# Altium PCB PCB1.PcbDoc (part 2 of 3)
Units mil, origin at the board's own origin, x right, y up, seen from the top; angles counter-clockwise.
Board outline 1929.13 x 1929.13 mil, 2 copper layers (Top Layer, Bottom Layer); 46 components, 43 nets, 184 pads, 94 vias.
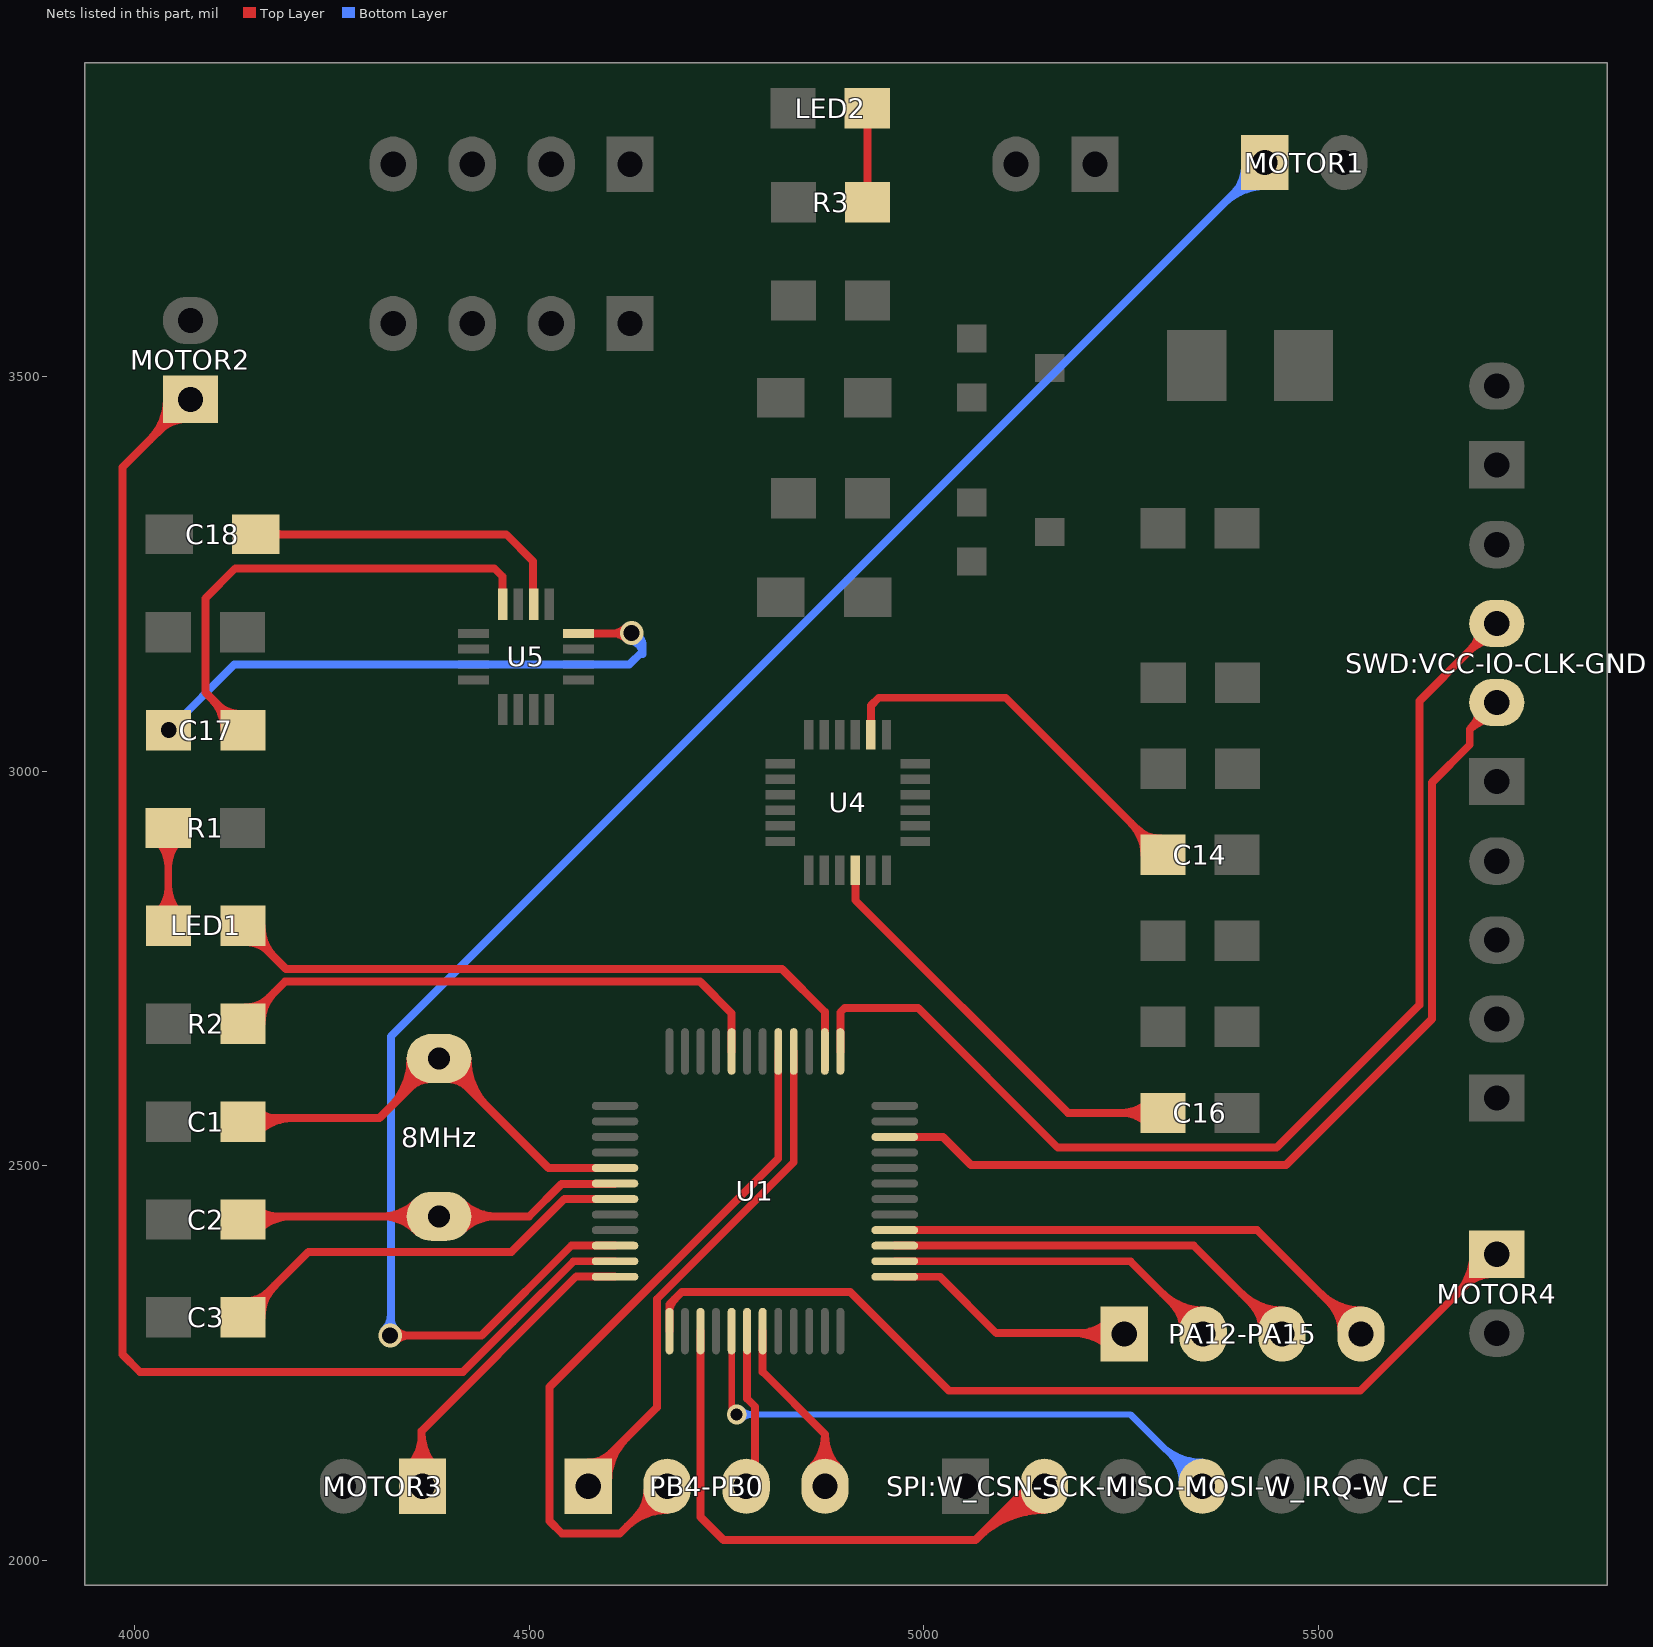
[diagram p2: the nets of this part, all layers, seen from the top]

## Via types
v1: diameter 30, hole 20, Top Layer to Bottom Layer, 54 vias
v2: diameter 19.68, hole 19.68, Top Layer to Bottom Layer, 32 vias
v3: diameter 25, hole 15, Top Layer to Bottom Layer, 4 vias
v4: diameter 196.85, hole 137.8, Top Layer to Bottom Layer, 4 vias

## Nets (pads, with @x,y where several pads share a name; then routed paths per layer and width w, separated by ;. In a path a pad name is that pad's centre, name@x,y a point inside that pad or via, vN(x,y) a via of type N, cw(c..) or ccw(c..) an arc to the next point about the centre after c; other vN are vias at no path point) (continued)
MOSI: SPI:W_CSN-SCK-MISO-MOSI-W_IRQ-W_CE.4 U1.17 | length 1646
  Top Layer w8: U1.17@4756.64,2290.57 4756.64,2191.36 v3(4763,2185)
  Bottom Layer w8: v3(4763,2185) 5262,2185 SPI:W_CSN-SCK-MISO-MOSI-W_IRQ-W_CE.4@5353,2094 ; v3@4769.01,2178.99 cw(c4783.52,2164.48) 4783.52,2185 ; v3@4769.01,2178.99 cw(c4783.52,2164.48) 4783.52,2185 ; v3@4769.01,2178.99 cw(c4783.52,2164.48) 4783.52,2185 ; v3@4769.01,2178.99 cw(c4783.52,2164.48) 4783.52,2185 ; v3@4769.01,2191.01 ccw(c4783.52,2205.52) 4783.52,2185 ; v3@4769.01,2191.01 ccw(c4783.52,2205.52) 4783.52,2185 ; v3@4769.01,2191.01 ccw(c4783.52,2205.52) 4783.52,2185 ; v3@4769.01,2191.01 ccw(c4783.52,2205.52) 4783.52,2185 ; 5300.08,2146.92 ccw(c5353,2199.84) SPI:W_CSN-SCK-MISO-MOSI-W_IRQ-W_CE.4@5353,2125 ; 5300.08,2146.92 ccw(c5353,2199.84) SPI:W_CSN-SCK-MISO-MOSI-W_IRQ-W_CE.4@5353,2125 ; 5300.08,2146.92 ccw(c5353,2199.84) SPI:W_CSN-SCK-MISO-MOSI-W_IRQ-W_CE.4@5353,2125 ; 5300.08,2146.92 ccw(c5353,2199.84) SPI:W_CSN-SCK-MISO-MOSI-W_IRQ-W_CE.4@5353,2125 ; 5312.15,2134.85 cw(c5276.3,2099) SPI:W_CSN-SCK-MISO-MOSI-W_IRQ-W_CE.4@5327,2099 ; 5312.15,2134.85 cw(c5276.3,2099) SPI:W_CSN-SCK-MISO-MOSI-W_IRQ-W_CE.4@5327,2099 ; 5312.15,2134.85 cw(c5276.3,2099) SPI:W_CSN-SCK-MISO-MOSI-W_IRQ-W_CE.4@5327,2099 ; 5312.15,2134.85 cw(c5276.3,2099) SPI:W_CSN-SCK-MISO-MOSI-W_IRQ-W_CE.4@5327,2099 ; 5313.74,2133.26 ccw(c5353,2172.53) SPI:W_CSN-SCK-MISO-MOSI-W_IRQ-W_CE.4@5353,2117 ; 5313.74,2133.26 ccw(c5353,2172.53) SPI:W_CSN-SCK-MISO-MOSI-W_IRQ-W_CE.4@5353,2117 ; 5313.74,2133.26 ccw(c5353,2172.53) SPI:W_CSN-SCK-MISO-MOSI-W_IRQ-W_CE.4@5353,2117 ; 5313.74,2133.26 ccw(c5353,2172.53) SPI:W_CSN-SCK-MISO-MOSI-W_IRQ-W_CE.4@5353,2117 ; 5325.81,2121.19 cw(c5303.62,2099) SPI:W_CSN-SCK-MISO-MOSI-W_IRQ-W_CE.4@5335,2099 ; 5325.81,2121.19 cw(c5303.62,2099) SPI:W_CSN-SCK-MISO-MOSI-W_IRQ-W_CE.4@5335,2099 ; 5325.81,2121.19 cw(c5303.62,2099) SPI:W_CSN-SCK-MISO-MOSI-W_IRQ-W_CE.4@5335,2099 ; 5325.81,2121.19 cw(c5303.62,2099) SPI:W_CSN-SCK-MISO-MOSI-W_IRQ-W_CE.4@5335,2099 ; 5327.39,2119.61 ccw(c5353,2145.21) SPI:W_CSN-SCK-MISO-MOSI-W_IRQ-W_CE.4@5353,2109 ; 5327.39,2119.61 ccw(c5353,2145.21) SPI:W_CSN-SCK-MISO-MOSI-W_IRQ-W_CE.4@5353,2109 ; 5327.39,2119.61 ccw(c5353,2145.21) SPI:W_CSN-SCK-MISO-MOSI-W_IRQ-W_CE.4@5353,2109 ; 5327.39,2119.61 ccw(c5353,2145.21) SPI:W_CSN-SCK-MISO-MOSI-W_IRQ-W_CE.4@5353,2109
MOTOR1: MOTOR1.1 U1.10 | length 3640.9
  Top Layer w10: v1(4324,2285) 4439.75,2285 4553.58,2398.83 U1.10@4609,2398.83 ; v1@4331.07,2277.93 cw(c4348.14,2260.86) 4348.14,2285 ; v1@4331.07,2277.93 cw(c4348.14,2260.86) 4348.14,2285 ; v1@4331.07,2277.93 cw(c4348.14,2260.86) 4348.14,2285 ; v1@4331.07,2277.93 cw(c4348.14,2260.86) 4348.14,2285 ; v1@4331.07,2292.07 ccw(c4348.14,2309.14) 4348.14,2285 ; v1@4331.07,2292.07 ccw(c4348.14,2309.14) 4348.14,2285 ; v1@4331.07,2292.07 ccw(c4348.14,2309.14) 4348.14,2285 ; v1@4331.07,2292.07 ccw(c4348.14,2309.14) 4348.14,2285
  Bottom Layer w10: v1@4325,2286 4325,2664 MOTOR1.1@5432,3771 ; v1@4316.93,2292.07 ccw(c4297.44,2311.56) 4325,2311.56 ; v1@4316.93,2292.07 ccw(c4297.44,2311.56) 4325,2311.56 ; v1@4316.93,2292.07 ccw(c4297.44,2311.56) 4325,2311.56 ; v1@4316.93,2292.07 ccw(c4297.44,2311.56) 4325,2311.56 ; 4325,2306.73 ccw(c4345.73,2306.73) v1@4331.07,2292.07 ; 4325,2306.73 ccw(c4345.73,2306.73) v1@4331.07,2292.07 ; 4325,2306.73 ccw(c4345.73,2306.73) v1@4331.07,2292.07 ; 4325,2306.73 ccw(c4345.73,2306.73) v1@4331.07,2292.07 ; 5380.79,3719.79 cw(c5432,3668.57) MOTOR1.1@5432,3741 ; 5380.79,3719.79 cw(c5432,3668.57) MOTOR1.1@5432,3741 ; 5380.79,3719.79 cw(c5432,3668.57) MOTOR1.1@5432,3741 ; 5380.79,3719.79 cw(c5432,3668.57) MOTOR1.1@5432,3741 ; 5380.79,3719.79 cw(c5432,3668.57) MOTOR1.1@5432,3741 ; 5380.79,3719.79 cw(c5432,3668.57) MOTOR1.1@5432,3741 ; 5380.79,3719.79 cw(c5432,3668.57) MOTOR1.1@5432,3741 ; 5380.79,3719.79 cw(c5432,3668.57) MOTOR1.1@5432,3741 ; 5392.86,3731.86 ccw(c5358.72,3766) MOTOR1.1@5407,3766 ; 5392.86,3731.86 ccw(c5358.72,3766) MOTOR1.1@5407,3766 ; 5392.86,3731.86 ccw(c5358.72,3766) MOTOR1.1@5407,3766 ; 5392.86,3731.86 ccw(c5358.72,3766) MOTOR1.1@5407,3766 ; 5392.86,3731.86 ccw(c5358.72,3766) MOTOR1.1@5407,3766 ; 5392.86,3731.86 ccw(c5358.72,3766) MOTOR1.1@5407,3766 ; 5392.86,3731.86 ccw(c5358.72,3766) MOTOR1.1@5407,3766 ; 5392.86,3731.86 ccw(c5358.72,3766) MOTOR1.1@5407,3766 ; 5397.86,3736.86 cw(c5432,3702.72) MOTOR1.1@5432,3751 ; 5397.86,3736.86 cw(c5432,3702.72) MOTOR1.1@5432,3751 ; 5397.86,3736.86 cw(c5432,3702.72) MOTOR1.1@5432,3751 ; 5397.86,3736.86 cw(c5432,3702.72) MOTOR1.1@5432,3751 ; 5397.86,3736.86 cw(c5432,3702.72) MOTOR1.1@5432,3751 ; 5397.86,3736.86 cw(c5432,3702.72) MOTOR1.1@5432,3751 ; 5397.86,3736.86 cw(c5432,3702.72) MOTOR1.1@5432,3751 ; 5397.86,3736.86 cw(c5432,3702.72) MOTOR1.1@5432,3751
MOTOR2: MOTOR2.1 U1.11 | length 2998.6
  Top Layer w10: MOTOR2.1@4071,3471 3985,3385 3985,2261 4007,2239 4416.37,2239 4479.75,2302.37 4556.52,2379.15 U1.11@4609,2379.15 ; 4019.79,3419.79 ccw(c3968.57,3471) MOTOR2.1@4041,3471 ; 4019.79,3419.79 ccw(c3968.57,3471) MOTOR2.1@4041,3471 ; 4019.79,3419.79 ccw(c3968.57,3471) MOTOR2.1@4041,3471 ; 4019.79,3419.79 ccw(c3968.57,3471) MOTOR2.1@4041,3471 ; 4019.79,3419.79 ccw(c3968.57,3471) MOTOR2.1@4041,3471 ; 4019.79,3419.79 ccw(c3968.57,3471) MOTOR2.1@4041,3471 ; 4019.79,3419.79 ccw(c3968.57,3471) MOTOR2.1@4041,3471 ; 4019.79,3419.79 ccw(c3968.57,3471) MOTOR2.1@4041,3471 ; 4031.86,3431.86 cw(c4066,3397.72) MOTOR2.1@4066,3446 ; 4031.86,3431.86 cw(c4066,3397.72) MOTOR2.1@4066,3446 ; 4031.86,3431.86 cw(c4066,3397.72) MOTOR2.1@4066,3446 ; 4031.86,3431.86 cw(c4066,3397.72) MOTOR2.1@4066,3446 ; 4031.86,3431.86 cw(c4066,3397.72) MOTOR2.1@4066,3446 ; 4031.86,3431.86 cw(c4066,3397.72) MOTOR2.1@4066,3446 ; 4031.86,3431.86 cw(c4066,3397.72) MOTOR2.1@4066,3446 ; 4031.86,3431.86 cw(c4066,3397.72) MOTOR2.1@4066,3446 ; 4036.86,3436.86 ccw(c4002.72,3471) MOTOR2.1@4051,3471 ; 4036.86,3436.86 ccw(c4002.72,3471) MOTOR2.1@4051,3471 ; 4036.86,3436.86 ccw(c4002.72,3471) MOTOR2.1@4051,3471 ; 4036.86,3436.86 ccw(c4002.72,3471) MOTOR2.1@4051,3471 ; 4036.86,3436.86 ccw(c4002.72,3471) MOTOR2.1@4051,3471 ; 4036.86,3436.86 ccw(c4002.72,3471) MOTOR2.1@4051,3471 ; 4036.86,3436.86 ccw(c4002.72,3471) MOTOR2.1@4051,3471 ; 4036.86,3436.86 ccw(c4002.72,3471) MOTOR2.1@4051,3471
MOTOR3: MOTOR3.1 U1.12 | length 1609.2
  Top Layer w10: MOTOR3.1@4364,2094 4364,2164 4560,2360 U1.12@4608.46,2360 ; MOTOR3.1@4346.32,2116.68 ccw(c4303.64,2159.36) 4364,2159.36 ; MOTOR3.1@4346.32,2116.68 ccw(c4303.64,2159.36) 4364,2159.36 ; MOTOR3.1@4346.32,2116.68 ccw(c4303.64,2159.36) 4364,2159.36 ; MOTOR3.1@4346.32,2116.68 ccw(c4303.64,2159.36) 4364,2159.36 ; MOTOR3.1@4347.32,2116.68 ccw(c4307.06,2156.94) 4364,2156.94 ; MOTOR3.1@4347.32,2116.68 ccw(c4307.06,2156.94) 4364,2156.94 ; MOTOR3.1@4347.32,2116.68 ccw(c4307.06,2156.94) 4364,2156.94 ; MOTOR3.1@4347.32,2116.68 ccw(c4307.06,2156.94) 4364,2156.94 ; MOTOR3.1@4353.39,2109.61 ccw(c4327.79,2135.21) 4364,2135.21 ; MOTOR3.1@4353.39,2109.61 ccw(c4327.79,2135.21) 4364,2135.21 ; MOTOR3.1@4353.39,2109.61 ccw(c4327.79,2135.21) 4364,2135.21 ; MOTOR3.1@4353.39,2109.61 ccw(c4327.79,2135.21) 4364,2135.21 ; MOTOR3.1@4354.39,2109.61 ccw(c4331.2,2132.8) 4364,2132.8 ; MOTOR3.1@4354.39,2109.61 ccw(c4331.2,2132.8) 4364,2132.8 ; MOTOR3.1@4354.39,2109.61 ccw(c4331.2,2132.8) 4364,2132.8 ; MOTOR3.1@4354.39,2109.61 ccw(c4331.2,2132.8) 4364,2132.8 ; 4364,2135.21 ccw(c4400.21,2135.21) MOTOR3.1@4374.61,2109.61 ; 4364,2135.21 ccw(c4400.21,2135.21) MOTOR3.1@4374.61,2109.61 ; 4364,2135.21 ccw(c4400.21,2135.21) MOTOR3.1@4374.61,2109.61 ; 4364,2135.21 ccw(c4400.21,2135.21) MOTOR3.1@4374.61,2109.61 ; 4364,2137.63 ccw(c4403.63,2137.63) MOTOR3.1@4375.61,2109.61 ; 4364,2137.63 ccw(c4403.63,2137.63) MOTOR3.1@4375.61,2109.61 ; 4364,2137.63 ccw(c4403.63,2137.63) MOTOR3.1@4375.61,2109.61 ; 4364,2137.63 ccw(c4403.63,2137.63) MOTOR3.1@4375.61,2109.61 ; 4364,2159.36 ccw(c4424.36,2159.36) MOTOR3.1@4381.68,2116.68 ; 4364,2159.36 ccw(c4424.36,2159.36) MOTOR3.1@4381.68,2116.68 ; 4364,2159.36 ccw(c4424.36,2159.36) MOTOR3.1@4381.68,2116.68 ; 4364,2159.36 ccw(c4424.36,2159.36) MOTOR3.1@4381.68,2116.68 ; 4364,2161.77 ccw(c4427.77,2161.77) MOTOR3.1@4382.68,2116.68 ; 4364,2161.77 ccw(c4427.77,2161.77) MOTOR3.1@4382.68,2116.68 ; 4364,2161.77 ccw(c4427.77,2161.77) MOTOR3.1@4382.68,2116.68 ; 4364,2161.77 ccw(c4427.77,2161.77) MOTOR3.1@4382.68,2116.68
MOTOR4: MOTOR4.1 U1.13 | length 1885
  Top Layer w10: U1.13@4677.9,2290.57 4677.9,2324.47 4693.53,2340.09 4906.91,2340.09 5032,2215 5553,2215 MOTOR4.1@5726,2388 ; U1.13@4677.9,2315.09 cw(c4700.53,2315.09) 4684.53,2331.09 ; U1.13@4677.9,2315.09 cw(c4700.53,2315.09) 4684.53,2331.09 ; U1.13@4677.9,2315.09 cw(c4700.53,2315.09) 4684.53,2331.09 ; U1.13@4677.9,2315.09 cw(c4700.53,2315.09) 4684.53,2331.09 ; U1.13@4677.9,2315.09 cw(c4700.53,2315.09) 4684.53,2331.09 ; U1.13@4677.9,2315.09 cw(c4700.53,2315.09) 4684.53,2331.09 ; U1.13@4677.9,2315.09 cw(c4700.53,2315.09) 4684.53,2331.09 ; U1.13@4677.9,2315.09 cw(c4700.53,2315.09) 4684.53,2331.09 ; 5674.79,2336.79 ccw(c5623.57,2388) MOTOR4.1@5696,2388 ; 5674.79,2336.79 ccw(c5623.57,2388) MOTOR4.1@5696,2388 ; 5674.79,2336.79 ccw(c5623.57,2388) MOTOR4.1@5696,2388 ; 5674.79,2336.79 ccw(c5623.57,2388) MOTOR4.1@5696,2388 ; 5686.86,2348.86 cw(c5721,2314.72) MOTOR4.1@5721,2363 ; 5686.86,2348.86 cw(c5721,2314.72) MOTOR4.1@5721,2363 ; 5686.86,2348.86 cw(c5721,2314.72) MOTOR4.1@5721,2363 ; 5686.86,2348.86 cw(c5721,2314.72) MOTOR4.1@5721,2363 ; 5691.86,2353.86 ccw(c5657.72,2388) MOTOR4.1@5706,2388 ; 5691.86,2353.86 ccw(c5657.72,2388) MOTOR4.1@5706,2388 ; 5691.86,2353.86 ccw(c5657.72,2388) MOTOR4.1@5706,2388 ; 5691.86,2353.86 ccw(c5657.72,2388) MOTOR4.1@5706,2388
Net8MHz_1: 8MHz.1 C2.2 U1.6 | length 2199.3
  Top Layer w10: C2.2@4137.57,2432 4141.57,2436 8MHz.1@4386,2436 4500.24,2436 4541.24,2477 U1.6@4608.42,2477 ; C2.2@4148.01,2424.51 cw(c4175.74,2396.78) 4175.74,2436 ; C2.2@4148.01,2424.51 cw(c4175.74,2396.78) 4175.74,2436 ; C2.2@4148.01,2424.51 cw(c4175.74,2396.78) 4175.74,2436 ; C2.2@4148.01,2424.51 cw(c4175.74,2396.78) 4175.74,2436 ; C2.2@4155.08,2417.44 cw(c4199.89,2372.63) 4199.89,2436 ; C2.2@4155.08,2417.44 cw(c4199.89,2372.63) 4199.89,2436 ; C2.2@4155.08,2417.44 cw(c4199.89,2372.63) 4199.89,2436 ; C2.2@4155.08,2417.44 cw(c4199.89,2372.63) 4199.89,2436 ; C2.2@4155.08,2446.56 ccw(c4180.57,2472.05) 4180.57,2436 ; C2.2@4155.08,2446.56 ccw(c4180.57,2472.05) 4180.57,2436 ; C2.2@4155.08,2446.56 ccw(c4180.57,2472.05) 4180.57,2436 ; C2.2@4155.08,2446.56 ccw(c4180.57,2472.05) 4180.57,2436 ; 4313.23,2436 cw(c4313.23,2373.23) 8MHz.1@4357.62,2417.62 ; 4313.23,2436 ccw(c4313.23,2498.77) 8MHz.1@4357.62,2454.38 ; 4313.23,2436 cw(c4313.23,2373.23) 8MHz.1@4357.62,2417.62 ; 4313.23,2436 ccw(c4313.23,2498.77) 8MHz.1@4357.62,2454.38 ; 4313.23,2436 ccw(c4313.23,2498.77) 8MHz.1@4357.62,2454.38 ; 4313.23,2436 cw(c4313.23,2373.23) 8MHz.1@4357.62,2417.62 ; 4313.23,2436 ccw(c4313.23,2498.77) 8MHz.1@4357.62,2454.38 ; 4313.23,2436 cw(c4313.23,2373.23) 8MHz.1@4357.62,2417.62 ; 4337.37,2436 cw(c4337.37,2397.37) 8MHz.1@4364.69,2424.69 ; 4337.37,2436 ccw(c4337.37,2474.63) 8MHz.1@4364.69,2447.31 ; 4337.37,2436 cw(c4337.37,2397.37) 8MHz.1@4364.69,2424.69 ; 4337.37,2436 ccw(c4337.37,2474.63) 8MHz.1@4364.69,2447.31 ; 4337.37,2436 ccw(c4337.37,2474.63) 8MHz.1@4364.69,2447.31 ; 4337.37,2436 cw(c4337.37,2397.37) 8MHz.1@4364.69,2424.69 ; 4337.37,2436 ccw(c4337.37,2474.63) 8MHz.1@4364.69,2447.31 ; 4337.37,2436 cw(c4337.37,2397.37) 8MHz.1@4364.69,2424.69 ; 8MHz.1@4407.31,2424.69 cw(c4434.63,2397.37) 4434.63,2436 ; 8MHz.1@4407.31,2424.69 cw(c4434.63,2397.37) 4434.63,2436 ; 8MHz.1@4407.31,2424.69 cw(c4434.63,2397.37) 4434.63,2436 ; 8MHz.1@4407.31,2424.69 cw(c4434.63,2397.37) 4434.63,2436 ; 8MHz.1@4407.31,2447.31 ccw(c4434.63,2474.63) 4434.63,2436 ; 8MHz.1@4407.31,2447.31 ccw(c4434.63,2474.63) 4434.63,2436 ; 8MHz.1@4407.31,2447.31 ccw(c4434.63,2474.63) 4434.63,2436 ; 8MHz.1@4407.31,2447.31 ccw(c4434.63,2474.63) 4434.63,2436 ; 8MHz.1@4414.38,2417.62 cw(c4458.77,2373.23) 4458.77,2436 ; 8MHz.1@4414.38,2417.62 cw(c4458.77,2373.23) 4458.77,2436 ; 8MHz.1@4414.38,2417.62 cw(c4458.77,2373.23) 4458.77,2436 ; 8MHz.1@4414.38,2417.62 cw(c4458.77,2373.23) 4458.77,2436 ; 8MHz.1@4414.38,2454.38 ccw(c4458.77,2498.77) 4458.77,2436 ; 8MHz.1@4414.38,2454.38 ccw(c4458.77,2498.77) 4458.77,2436 ; 8MHz.1@4414.38,2454.38 ccw(c4458.77,2498.77) 4458.77,2436 ; 8MHz.1@4414.38,2454.38 ccw(c4458.77,2498.77) 4458.77,2436
Net8MHz_2: 8MHz.2 C1.2 U1.5 | length 2428.8
  Top Layer w10: C1.2@4137.57,2556 4142.07,2560.5 4310.5,2560.5 8MHz.2@4386,2636 4524.74,2497.26 U1.5@4609,2497.26 ; C1.2@4148.01,2548.51 cw(c4176.95,2519.57) 4176.95,2560.5 ; C1.2@4148.01,2548.51 cw(c4176.95,2519.57) 4176.95,2560.5 ; C1.2@4148.01,2548.51 cw(c4176.95,2519.57) 4176.95,2560.5 ; C1.2@4148.01,2548.51 cw(c4176.95,2519.57) 4176.95,2560.5 ; C1.2@4155.08,2541.44 cw(c4201.09,2495.43) 4201.09,2560.5 ; C1.2@4155.08,2541.44 cw(c4201.09,2495.43) 4201.09,2560.5 ; C1.2@4155.08,2541.44 cw(c4201.09,2495.43) 4201.09,2560.5 ; C1.2@4155.08,2541.44 cw(c4201.09,2495.43) 4201.09,2560.5 ; C1.2@4155.08,2570.56 ccw(c4179.36,2594.85) 4179.36,2560.5 ; C1.2@4155.08,2570.56 ccw(c4179.36,2594.85) 4179.36,2560.5 ; C1.2@4155.08,2570.56 ccw(c4179.36,2594.85) 4179.36,2560.5 ; C1.2@4155.08,2570.56 ccw(c4179.36,2594.85) 4179.36,2560.5 ; 4324.54,2574.54 ccw(c4263.09,2636) 8MHz.2@4350,2636 ; 4324.54,2574.54 ccw(c4263.09,2636) 8MHz.2@4350,2636 ; 4324.54,2574.54 ccw(c4263.09,2636) 8MHz.2@4350,2636 ; 4324.54,2574.54 ccw(c4263.09,2636) 8MHz.2@4350,2636 ; 4341.62,2591.62 ccw(c4297.23,2636) 8MHz.2@4360,2636 ; 4341.62,2591.62 ccw(c4297.23,2636) 8MHz.2@4360,2636 ; 4341.62,2591.62 ccw(c4297.23,2636) 8MHz.2@4360,2636 ; 4341.62,2591.62 ccw(c4297.23,2636) 8MHz.2@4360,2636 ; 4348.69,2598.69 cw(c4376,2571.37) 8MHz.2@4376,2610 ; 4348.69,2598.69 cw(c4376,2571.37) 8MHz.2@4376,2610 ; 4348.69,2598.69 cw(c4376,2571.37) 8MHz.2@4376,2610 ; 4348.69,2598.69 cw(c4376,2571.37) 8MHz.2@4376,2610 ; 4358.69,2608.69 ccw(c4331.37,2636) 8MHz.2@4370,2636 ; 4358.69,2608.69 ccw(c4331.37,2636) 8MHz.2@4370,2636 ; 4358.69,2608.69 ccw(c4331.37,2636) 8MHz.2@4370,2636 ; 4358.69,2608.69 ccw(c4331.37,2636) 8MHz.2@4370,2636 ; 8MHz.2@4396,2610 cw(c4396,2571.37) 4423.31,2598.69 ; 8MHz.2@4396,2610 cw(c4396,2571.37) 4423.31,2598.69 ; 8MHz.2@4396,2610 cw(c4396,2571.37) 4423.31,2598.69 ; 8MHz.2@4396,2610 cw(c4396,2571.37) 4423.31,2598.69 ; 8MHz.2@4402,2636 ccw(c4440.63,2636) 4413.31,2608.69 ; 8MHz.2@4402,2636 ccw(c4440.63,2636) 4413.31,2608.69 ; 8MHz.2@4402,2636 ccw(c4440.63,2636) 4413.31,2608.69 ; 8MHz.2@4402,2636 ccw(c4440.63,2636) 4413.31,2608.69 ; 8MHz.2@4412,2636 ccw(c4474.77,2636) 4430.38,2591.62 ; 8MHz.2@4412,2636 ccw(c4474.77,2636) 4430.38,2591.62 ; 8MHz.2@4412,2636 ccw(c4474.77,2636) 4430.38,2591.62 ; 8MHz.2@4412,2636 ccw(c4474.77,2636) 4430.38,2591.62 ; 8MHz.2@4422,2636 ccw(c4508.91,2636) 4447.46,2574.54 ; 8MHz.2@4422,2636 ccw(c4508.91,2636) 4447.46,2574.54 ; 8MHz.2@4422,2636 ccw(c4508.91,2636) 4447.46,2574.54 ; 8MHz.2@4422,2636 ccw(c4508.91,2636) 4447.46,2574.54
NetC3_2: C3.2 U1.7 | length 948.6
  Top Layer w10: C3.2@4137.57,2308 4220.57,2391 4477.86,2391 4544.75,2457.89 U1.7@4609,2457.89 ; C3.2@4140.52,2328.59 ccw(c4140.52,2371.17) 4170.63,2341.06 ; C3.2@4140.52,2328.59 ccw(c4140.52,2371.17) 4170.63,2341.06 ; C3.2@4140.52,2328.59 ccw(c4140.52,2371.17) 4170.63,2341.06 ; C3.2@4140.52,2328.59 ccw(c4140.52,2371.17) 4170.63,2341.06 ; C3.2@4151.11,2308 cw(c4183.81,2308) C3.2@4160.69,2331.12 ; C3.2@4151.11,2308 cw(c4183.81,2308) C3.2@4160.69,2331.12 ; C3.2@4151.11,2308 cw(c4183.81,2308) C3.2@4160.69,2331.12 ; C3.2@4151.11,2308 cw(c4183.81,2308) C3.2@4160.69,2331.12 ; C3.2@4161.11,2308 cw(c4217.95,2308) 4177.76,2348.19 ; C3.2@4161.11,2308 cw(c4217.95,2308) 4177.76,2348.19 ; C3.2@4161.11,2308 cw(c4217.95,2308) 4177.76,2348.19 ; C3.2@4161.11,2308 cw(c4217.95,2308) 4177.76,2348.19
NetC14_2: C14.2 U4.20 | length 908.7
  Top Layer w10: U4.20@4933.13,3045.85 4933.13,3083.13 4943,3093 5103.94,3093 C14.2@5302.94,2894 ; 5262.75,2934.19 cw(c5222.56,2894) C14.2@5279.4,2894 ; 5262.75,2934.19 cw(c5222.56,2894) C14.2@5279.4,2894 ; 5262.75,2934.19 cw(c5222.56,2894) C14.2@5279.4,2894 ; 5262.75,2934.19 cw(c5222.56,2894) C14.2@5279.4,2894 ; 5269.88,2927.06 ccw(c5299.99,2957.17) C14.2@5299.99,2914.59 ; 5269.88,2927.06 ccw(c5299.99,2957.17) C14.2@5299.99,2914.59 ; 5269.88,2927.06 ccw(c5299.99,2957.17) C14.2@5299.99,2914.59 ; 5269.88,2927.06 ccw(c5299.99,2957.17) C14.2@5299.99,2914.59 ; C14.2@5279.82,2917.12 cw(c5256.7,2894) C14.2@5289.4,2894 ; C14.2@5279.82,2917.12 cw(c5256.7,2894) C14.2@5289.4,2894 ; C14.2@5279.82,2917.12 cw(c5256.7,2894) C14.2@5289.4,2894 ; C14.2@5279.82,2917.12 cw(c5256.7,2894) C14.2@5289.4,2894
NetC16_2: C16.2 U4.10 | length 851.5
  Top Layer w10: U4.10@4913.45,2874.59 4913.45,2836.55 5183,2567 C16.2@5302.94,2567 ; 5250.28,2567 cw(c5250.28,2517.29) C16.2@5285.43,2552.44 ; 5250.28,2567 ccw(c5250.28,2616.71) C16.2@5285.43,2581.56 ; 5250.28,2567 cw(c5250.28,2517.29) C16.2@5285.43,2552.44 ; 5250.28,2567 ccw(c5250.28,2616.71) C16.2@5285.43,2581.56 ; 5250.28,2567 ccw(c5250.28,2616.71) C16.2@5285.43,2581.56 ; 5250.28,2567 cw(c5250.28,2517.29) C16.2@5285.43,2552.44 ; 5250.28,2567 ccw(c5250.28,2616.71) C16.2@5285.43,2581.56 ; 5250.28,2567 cw(c5250.28,2517.29) C16.2@5285.43,2552.44
NetC17_1: C17.1 U5.8 | length 985
  Top Layer w10: U5.8@4562.67,3174.45 v1@4629.45,3174.45 ; 4604.53,3174.45 ccw(c4604.53,3200.47) 4622.93,3182.07 cw(c4604.53,3200.47) 4604.53,3174.45 ; 4607.19,3174.45 cw(c4607.19,3152.19) 4622.93,3167.93 ccw(c4607.19,3152.19) 4607.19,3174.45
  Bottom Layer w10: v1(4043.5,3052) 4126.5,3135 4627,3135 4644,3152 4644,3161 v1(4630,3175) ; 4060.58,3069.07 cw(c4043.5,3086.14) 4043.5,3062 ccw(c4043.5,3086.14) 4060.58,3069.07 ; 4060.58,3069.07 ccw(c4077.65,3052) 4053.5,3052 cw(c4077.65,3052) 4060.58,3069.07 ; v1(4630,3175) cw(c4628.19,3159.29) 4644,3159.29 ccw(c4628.19,3159.29) v1(4630,3175) ; v1@4628.86,3165.07 cw(c4626.9,3148.07) 4644,3148.07 ccw(c4626.9,3148.07) v1@4628.86,3165.07
NetC17_2: C17.2 U5.12 | length 825.9
  Top Layer w10: C17.2@4137.57,3052 4090,3099.57 4090,3219 4128,3257 4456,3257 4466.57,3246.43 U5.12@4466.57,3211.5 ; 4097.37,3092.19 cw(c4057.18,3052) 4114.02,3052 ccw(c4057.18,3052) 4097.37,3092.19 ; 4104.5,3085.06 ccw(c4134.61,3115.17) 4134.61,3072.59 cw(c4134.61,3115.17) 4104.5,3085.06 ; C17.2@4114.45,3075.12 cw(c4091.33,3052) 4124.02,3052 ccw(c4091.33,3052) C17.2@4114.45,3075.12
NetC18_1: C18.A U5.10 | length 591.8
  Top Layer w10: C18.A@4137,3300 4471,3300 4505,3266 U5.10@4505,3212.43 ; 4189.66,3300 cw(c4189.66,3349.71) 4154.51,3314.56 ccw(c4189.66,3349.71) 4189.66,3300 ; 4189.66,3300 ccw(c4189.66,3250.29) 4154.51,3285.44 cw(c4189.66,3250.29) 4189.66,3300
NetLED1_1: LED1.1 R1.2 | length 834.5
  Top Layer w10: LED1.1@4042.94,2804.57 R1.2@4042.94,2928 ; R1.2@4028.38,2913.44 cw(c3993.23,2878.29) 4042.94,2878.29 ; R1.2@4028.38,2913.44 cw(c3993.23,2878.29) 4042.94,2878.29 ; R1.2@4028.38,2913.44 cw(c3993.23,2878.29) 4042.94,2878.29 ; R1.2@4028.38,2913.44 cw(c3993.23,2878.29) 4042.94,2878.29 ; LED1.1@4028.94,2818.56 ccw(c3995.16,2852.34) 4042.94,2852.34 ; LED1.1@4028.94,2818.56 ccw(c3995.16,2852.34) 4042.94,2852.34 ; LED1.1@4028.94,2818.56 ccw(c3995.16,2852.34) 4042.94,2852.34 ; LED1.1@4028.94,2818.56 ccw(c3995.16,2852.34) 4042.94,2852.34 ; 4042.94,2830.93 ccw(c4070.44,2830.93) LED1.1@4050.99,2811.49 ; 4042.94,2830.93 ccw(c4070.44,2830.93) LED1.1@4050.99,2811.49 ; 4042.94,2830.93 ccw(c4070.44,2830.93) LED1.1@4050.99,2811.49 ; 4042.94,2830.93 ccw(c4070.44,2830.93) LED1.1@4050.99,2811.49 ; 4042.94,2855.08 ccw(c4094.58,2855.08) LED1.1@4058.06,2818.56 ; 4042.94,2855.08 ccw(c4094.58,2855.08) LED1.1@4058.06,2818.56 ; 4042.94,2855.08 ccw(c4094.58,2855.08) LED1.1@4058.06,2818.56 ; 4042.94,2855.08 ccw(c4094.58,2855.08) LED1.1@4058.06,2818.56 ; 4042.94,2878.29 cw(c4092.65,2878.29) R1.2@4057.5,2913.44 ; 4042.94,2878.29 cw(c4092.65,2878.29) R1.2@4057.5,2913.44 ; 4042.94,2878.29 cw(c4092.65,2878.29) R1.2@4057.5,2913.44 ; 4042.94,2878.29 cw(c4092.65,2878.29) R1.2@4057.5,2913.44
NetLED1_2: LED1.2 U1.38 | length 1247.6
  Top Layer w10: LED1.2@4137.57,2804 4192.07,2749.5 4820.5,2749.5 4874.75,2695.25 U1.38@4874.75,2644.9 ; LED1.2@4140.52,2783.41 cw(c4140.52,2740.83) 4170.63,2770.94 ; LED1.2@4140.52,2783.41 cw(c4140.52,2740.83) 4170.63,2770.94 ; LED1.2@4140.52,2783.41 cw(c4140.52,2740.83) 4170.63,2770.94 ; LED1.2@4140.52,2783.41 cw(c4140.52,2740.83) 4170.63,2770.94 ; LED1.2@4151.11,2804 ccw(c4183.81,2804) LED1.2@4160.69,2780.88 ; LED1.2@4151.11,2804 ccw(c4183.81,2804) LED1.2@4160.69,2780.88 ; LED1.2@4151.11,2804 ccw(c4183.81,2804) LED1.2@4160.69,2780.88 ; LED1.2@4151.11,2804 ccw(c4183.81,2804) LED1.2@4160.69,2780.88 ; LED1.2@4161.11,2804 ccw(c4217.95,2804) 4177.76,2763.81 ; LED1.2@4161.11,2804 ccw(c4217.95,2804) 4177.76,2763.81 ; LED1.2@4161.11,2804 ccw(c4217.95,2804) 4177.76,2763.81 ; LED1.2@4161.11,2804 ccw(c4217.95,2804) 4177.76,2763.81
NetLED2_1: LED2.1 R3.2 | length 118.4
  Top Layer w10: R3.2@4929.06,3721 LED2.1@4929.06,3839.43
NetR2_2: R2.2 U1.44 | length 1121.4
  Top Layer w10: R2.2@4137.57,2680 4191.07,2733.5 4716.5,2733.5 4756.64,2693.36 U1.44@4756.64,2644.9 ; R2.2@4140.52,2700.59 ccw(c4140.52,2743.17) 4170.63,2713.06 ; R2.2@4140.52,2700.59 ccw(c4140.52,2743.17) 4170.63,2713.06 ; R2.2@4140.52,2700.59 ccw(c4140.52,2743.17) 4170.63,2713.06 ; R2.2@4140.52,2700.59 ccw(c4140.52,2743.17) 4170.63,2713.06 ; R2.2@4151.11,2680 cw(c4183.81,2680) R2.2@4160.69,2703.12 ; R2.2@4151.11,2680 cw(c4183.81,2680) R2.2@4160.69,2703.12 ; R2.2@4151.11,2680 cw(c4183.81,2680) R2.2@4160.69,2703.12 ; R2.2@4151.11,2680 cw(c4183.81,2680) R2.2@4160.69,2703.12 ; R2.2@4161.11,2680 cw(c4217.95,2680) 4177.76,2720.19 ; R2.2@4161.11,2680 cw(c4217.95,2680) 4177.76,2720.19 ; R2.2@4161.11,2680 cw(c4217.95,2680) 4177.76,2720.19 ; R2.2@4161.11,2680 cw(c4217.95,2680) 4177.76,2720.19
PB0: PB4-PB0.3 U1.18 | length 205.5
  Top Layer w10: PB4-PB0.3@4775,2094 4786.5,2105.5 4786.5,2194.73 4776.32,2204.91 U1.18@4776.32,2290.57
PB1: PB4-PB0.4 U1.19 | length 836
  Top Layer w10: U1.19@4796.01,2290.57 4796.01,2238.99 4875,2160 PB4-PB0.4@4875,2094 ; PB4-PB0.4@4857.32,2116.68 ccw(c4814.64,2159.36) 4875,2159.36 ; PB4-PB0.4@4857.32,2116.68 ccw(c4814.64,2159.36) 4875,2159.36 ; PB4-PB0.4@4857.32,2116.68 ccw(c4814.64,2159.36) 4875,2159.36 ; PB4-PB0.4@4857.32,2116.68 ccw(c4814.64,2159.36) 4875,2159.36 ; PB4-PB0.4@4864.39,2109.61 ccw(c4838.79,2135.21) 4875,2135.21 ; PB4-PB0.4@4864.39,2109.61 ccw(c4838.79,2135.21) 4875,2135.21 ; PB4-PB0.4@4864.39,2109.61 ccw(c4838.79,2135.21) 4875,2135.21 ; PB4-PB0.4@4864.39,2109.61 ccw(c4838.79,2135.21) 4875,2135.21 ; 4875,2135.21 ccw(c4911.21,2135.21) PB4-PB0.4@4885.61,2109.61 ; 4875,2135.21 ccw(c4911.21,2135.21) PB4-PB0.4@4885.61,2109.61 ; 4875,2135.21 ccw(c4911.21,2135.21) PB4-PB0.4@4885.61,2109.61 ; 4875,2135.21 ccw(c4911.21,2135.21) PB4-PB0.4@4885.61,2109.61 ; 4875,2159.36 ccw(c4935.36,2159.36) PB4-PB0.4@4892.68,2116.68 ; 4875,2159.36 ccw(c4935.36,2159.36) PB4-PB0.4@4892.68,2116.68 ; 4875,2159.36 ccw(c4935.36,2159.36) PB4-PB0.4@4892.68,2116.68 ; 4875,2159.36 ccw(c4935.36,2159.36) PB4-PB0.4@4892.68,2116.68
PB4: PB4-PB0.1 U1.40 | length 1212.4
  Top Layer w10: PB4-PB0.1@4575,2094 4575,2107 4661.9,2193.9 4661.9,2331.09 4835.38,2504.57 U1.40@4835.38,2644.9 ; PB4-PB0.1@4575,2124 ccw(c4575,2165.04) 4604.02,2136.02 ; PB4-PB0.1@4575,2124 ccw(c4575,2165.04) 4604.02,2136.02 ; PB4-PB0.1@4575,2124 ccw(c4575,2165.04) 4604.02,2136.02 ; PB4-PB0.1@4575,2124 ccw(c4575,2165.04) 4604.02,2136.02 ; PB4-PB0.1@4590,2099 cw(c4645.53,2099) 4606.26,2138.26 ; PB4-PB0.1@4590,2099 cw(c4645.53,2099) 4606.26,2138.26 ; PB4-PB0.1@4590,2099 cw(c4645.53,2099) 4606.26,2138.26 ; PB4-PB0.1@4590,2099 cw(c4645.53,2099) 4606.26,2138.26 ; PB4-PB0.1@4600,2099 cw(c4679.67,2099) 4623.33,2155.33 ; PB4-PB0.1@4600,2099 cw(c4679.67,2099) 4623.33,2155.33 ; PB4-PB0.1@4600,2099 cw(c4679.67,2099) 4623.33,2155.33 ; PB4-PB0.1@4600,2099 cw(c4679.67,2099) 4623.33,2155.33
PB5: PB4-PB0.2 U1.41 | length 1426.3
  Top Layer w10: PB4-PB0.2@4675,2094 4615,2034 4542,2034 4526,2050 4526,2219.74 4815.69,2509.43 U1.41@4815.69,2644.9 ; 4623.79,2042.79 cw(c4675,1991.57) PB4-PB0.2@4675,2064 ; 4623.79,2042.79 cw(c4675,1991.57) PB4-PB0.2@4675,2064 ; 4623.79,2042.79 cw(c4675,1991.57) PB4-PB0.2@4675,2064 ; 4623.79,2042.79 cw(c4675,1991.57) PB4-PB0.2@4675,2064 ; 4635.86,2054.86 ccw(c4601.72,2089) PB4-PB0.2@4650,2089 ; 4635.86,2054.86 ccw(c4601.72,2089) PB4-PB0.2@4650,2089 ; 4635.86,2054.86 ccw(c4601.72,2089) PB4-PB0.2@4650,2089 ; 4635.86,2054.86 ccw(c4601.72,2089) PB4-PB0.2@4650,2089 ; 4640.86,2059.86 cw(c4675,2025.72) PB4-PB0.2@4675,2074 ; 4640.86,2059.86 cw(c4675,2025.72) PB4-PB0.2@4675,2074 ; 4640.86,2059.86 cw(c4675,2025.72) PB4-PB0.2@4675,2074 ; 4640.86,2059.86 cw(c4675,2025.72) PB4-PB0.2@4675,2074
PB12: PA12-PA15.1 U1.25 | length 1229.4
  Top Layer w10: U1.25@4963.33,2359.46 5020.54,2359.46 5092,2288 PA12-PA15.1@5253,2288 ; 5191.23,2288 cw(c5191.23,2224.23) PA12-PA15.1@5236.32,2269.32 ; 5191.23,2288 cw(c5191.23,2224.23) PA12-PA15.1@5236.32,2269.32 ; 5191.23,2288 cw(c5191.23,2224.23) PA12-PA15.1@5236.32,2269.32 ; 5191.23,2288 cw(c5191.23,2224.23) PA12-PA15.1@5236.32,2269.32 ; 5196.06,2288 ccw(c5196.06,2344.94) PA12-PA15.1@5236.32,2304.68 ; 5196.06,2288 ccw(c5196.06,2344.94) PA12-PA15.1@5236.32,2304.68 ; 5196.06,2288 ccw(c5196.06,2344.94) PA12-PA15.1@5236.32,2304.68 ; 5196.06,2288 ccw(c5196.06,2344.94) PA12-PA15.1@5236.32,2304.68 ; 5204.72,2288 cw(c5204.72,2239.72) PA12-PA15.1@5238.86,2273.86 ; 5204.72,2288 ccw(c5204.72,2336.28) PA12-PA15.1@5238.86,2302.14 ; 5204.72,2288 cw(c5204.72,2239.72) PA12-PA15.1@5238.86,2273.86 ; 5204.72,2288 ccw(c5204.72,2336.28) PA12-PA15.1@5238.86,2302.14 ; 5204.72,2288 cw(c5204.72,2239.72) PA12-PA15.1@5238.86,2273.86 ; 5204.72,2288 ccw(c5204.72,2336.28) PA12-PA15.1@5238.86,2302.14 ; 5204.72,2288 cw(c5204.72,2239.72) PA12-PA15.1@5238.86,2273.86 ; 5204.72,2288 ccw(c5204.72,2336.28) PA12-PA15.1@5238.86,2302.14 ; 5215.37,2288 cw(c5215.37,2248.37) PA12-PA15.1@5243.39,2276.39 ; 5215.37,2288 cw(c5215.37,2248.37) PA12-PA15.1@5243.39,2276.39 ; 5215.37,2288 cw(c5215.37,2248.37) PA12-PA15.1@5243.39,2276.39 ; 5215.37,2288 cw(c5215.37,2248.37) PA12-PA15.1@5243.39,2276.39 ; 5220.2,2288 ccw(c5220.2,2320.8) PA12-PA15.1@5243.39,2297.61 ; 5220.2,2288 ccw(c5220.2,2320.8) PA12-PA15.1@5243.39,2297.61 ; 5220.2,2288 ccw(c5220.2,2320.8) PA12-PA15.1@5243.39,2297.61 ; 5220.2,2288 ccw(c5220.2,2320.8) PA12-PA15.1@5243.39,2297.61
PB13: PA12-PA15.2 U1.26 | length 1261.7
  Top Layer w10: U1.26@4963.33,2379.15 5261.85,2379.15 PA12-PA15.2@5353,2288 ; 5302.79,2338.21 ccw(c5354,2389.43) PA12-PA15.2@5354,2317 ; 5302.79,2338.21 ccw(c5354,2389.43) PA12-PA15.2@5354,2317 ; 5302.79,2338.21 ccw(c5354,2389.43) PA12-PA15.2@5354,2317 ; 5302.79,2338.21 ccw(c5354,2389.43) PA12-PA15.2@5354,2317 ; 5314.86,2326.14 cw(c5280.72,2292) PA12-PA15.2@5329,2292 ; 5314.86,2326.14 cw(c5280.72,2292) PA12-PA15.2@5329,2292 ; 5314.86,2326.14 cw(c5280.72,2292) PA12-PA15.2@5329,2292 ; 5314.86,2326.14 cw(c5280.72,2292) PA12-PA15.2@5329,2292 ; 5318.86,2322.14 cw(c5284.72,2288) PA12-PA15.2@5333,2288 ; 5318.86,2322.14 ccw(c5353,2356.28) PA12-PA15.2@5353,2308 ; 5318.86,2322.14 cw(c5284.72,2288) PA12-PA15.2@5333,2288 ; 5318.86,2322.14 ccw(c5353,2356.28) PA12-PA15.2@5353,2308 ; 5318.86,2322.14 cw(c5284.72,2288) PA12-PA15.2@5333,2288 ; 5318.86,2322.14 ccw(c5353,2356.28) PA12-PA15.2@5353,2308 ; 5318.86,2322.14 cw(c5284.72,2288) PA12-PA15.2@5333,2288 ; 5318.86,2322.14 ccw(c5353,2356.28) PA12-PA15.2@5353,2308 ; 5319.86,2321.14 ccw(c5354,2355.28) PA12-PA15.2@5354,2307 ; 5319.86,2321.14 ccw(c5354,2355.28) PA12-PA15.2@5354,2307 ; 5319.86,2321.14 ccw(c5354,2355.28) PA12-PA15.2@5354,2307 ; 5319.86,2321.14 ccw(c5354,2355.28) PA12-PA15.2@5354,2307
PB14: PA12-PA15.3 U1.27 | length 1369.9
  Top Layer w10: U1.27@4963.33,2398.83 5342.17,2398.83 PA12-PA15.3@5453,2288 ; 5402.79,2338.21 ccw(c5454,2389.43) PA12-PA15.3@5454,2317 ; 5402.79,2338.21 ccw(c5454,2389.43) PA12-PA15.3@5454,2317 ; 5402.79,2338.21 ccw(c5454,2389.43) PA12-PA15.3@5454,2317 ; 5402.79,2338.21 ccw(c5454,2389.43) PA12-PA15.3@5454,2317 ; 5414.86,2326.14 cw(c5380.72,2292) PA12-PA15.3@5429,2292 ; 5414.86,2326.14 cw(c5380.72,2292) PA12-PA15.3@5429,2292 ; 5414.86,2326.14 cw(c5380.72,2292) PA12-PA15.3@5429,2292 ; 5414.86,2326.14 cw(c5380.72,2292) PA12-PA15.3@5429,2292 ; 5418.86,2322.14 cw(c5384.72,2288) PA12-PA15.3@5433,2288 ; 5418.86,2322.14 ccw(c5453,2356.28) PA12-PA15.3@5453,2308 ; 5418.86,2322.14 cw(c5384.72,2288) PA12-PA15.3@5433,2288 ; 5418.86,2322.14 ccw(c5453,2356.28) PA12-PA15.3@5453,2308 ; 5418.86,2322.14 cw(c5384.72,2288) PA12-PA15.3@5433,2288 ; 5418.86,2322.14 ccw(c5453,2356.28) PA12-PA15.3@5453,2308 ; 5418.86,2322.14 cw(c5384.72,2288) PA12-PA15.3@5433,2288 ; 5418.86,2322.14 ccw(c5453,2356.28) PA12-PA15.3@5453,2308 ; 5419.86,2321.14 ccw(c5454,2355.28) PA12-PA15.3@5454,2307 ; 5419.86,2321.14 ccw(c5454,2355.28) PA12-PA15.3@5454,2307 ; 5419.86,2321.14 ccw(c5454,2355.28) PA12-PA15.3@5454,2307 ; 5419.86,2321.14 ccw(c5454,2355.28) PA12-PA15.3@5454,2307
PB15: PA12-PA15.4 U1.28 | length 1478
  Top Layer w10: U1.28@4963.33,2418.52 5422.48,2418.52 PA12-PA15.4@5553,2288 ; 5502.79,2338.21 ccw(c5554,2389.43) PA12-PA15.4@5554,2317 ; 5502.79,2338.21 ccw(c5554,2389.43) PA12-PA15.4@5554,2317 ; 5502.79,2338.21 ccw(c5554,2389.43) PA12-PA15.4@5554,2317 ; 5502.79,2338.21 ccw(c5554,2389.43) PA12-PA15.4@5554,2317 ; 5514.86,2326.14 cw(c5480.72,2292) PA12-PA15.4@5529,2292 ; 5514.86,2326.14 cw(c5480.72,2292) PA12-PA15.4@5529,2292 ; 5514.86,2326.14 cw(c5480.72,2292) PA12-PA15.4@5529,2292 ; 5514.86,2326.14 cw(c5480.72,2292) PA12-PA15.4@5529,2292 ; 5518.86,2322.14 cw(c5484.72,2288) PA12-PA15.4@5533,2288 ; 5518.86,2322.14 ccw(c5553,2356.28) PA12-PA15.4@5553,2308 ; 5518.86,2322.14 cw(c5484.72,2288) PA12-PA15.4@5533,2288 ; 5518.86,2322.14 ccw(c5553,2356.28) PA12-PA15.4@5553,2308 ; 5518.86,2322.14 cw(c5484.72,2288) PA12-PA15.4@5533,2288 ; 5518.86,2322.14 ccw(c5553,2356.28) PA12-PA15.4@5553,2308 ; 5518.86,2322.14 cw(c5484.72,2288) PA12-PA15.4@5533,2288 ; 5518.86,2322.14 ccw(c5553,2356.28) PA12-PA15.4@5553,2308 ; 5519.86,2321.14 ccw(c5554,2355.28) PA12-PA15.4@5554,2307 ; 5519.86,2321.14 ccw(c5554,2355.28) PA12-PA15.4@5554,2307 ; 5519.86,2321.14 ccw(c5554,2355.28) PA12-PA15.4@5554,2307 ; 5519.86,2321.14 ccw(c5554,2355.28) PA12-PA15.4@5554,2307
SCK: SPI:W_CSN-SCK-MISO-MOSI-W_IRQ-W_CE.2 U1.15 | length 1495.1
  Top Layer w10: U1.15@4717.27,2290.57 4717.27,2055.1 4746.37,2026 5065.56,2026 5133.56,2094 SPI:W_CSN-SCK-MISO-MOSI-W_IRQ-W_CE.2@5153,2094 ; 5068.59,2029.04 cw(c5153,1944.63) SPI:W_CSN-SCK-MISO-MOSI-W_IRQ-W_CE.2@5153,2064 ; 5068.59,2029.04 cw(c5153,1944.63) SPI:W_CSN-SCK-MISO-MOSI-W_IRQ-W_CE.2@5153,2064 ; 5068.59,2029.04 cw(c5153,1944.63) SPI:W_CSN-SCK-MISO-MOSI-W_IRQ-W_CE.2@5153,2064 ; 5085.67,2046.11 cw(c5153,1978.77) SPI:W_CSN-SCK-MISO-MOSI-W_IRQ-W_CE.2@5153,2074 ; 5085.67,2046.11 cw(c5153,1978.77) SPI:W_CSN-SCK-MISO-MOSI-W_IRQ-W_CE.2@5153,2074 ; 5085.67,2046.11 cw(c5153,1978.77) SPI:W_CSN-SCK-MISO-MOSI-W_IRQ-W_CE.2@5153,2074 ; 5102.74,2063.18 cw(c5153,2012.92) SPI:W_CSN-SCK-MISO-MOSI-W_IRQ-W_CE.2@5153,2084 ; 5102.74,2063.18 cw(c5153,2012.92) SPI:W_CSN-SCK-MISO-MOSI-W_IRQ-W_CE.2@5153,2084 ; 5102.74,2063.18 cw(c5153,2012.92) SPI:W_CSN-SCK-MISO-MOSI-W_IRQ-W_CE.2@5153,2084 ; 5119.81,2080.25 cw(c5153,2047.06) SPI:W_CSN-SCK-MISO-MOSI-W_IRQ-W_CE.2@5153,2094 ; 5119.81,2080.25 cw(c5153,2047.06) SPI:W_CSN-SCK-MISO-MOSI-W_IRQ-W_CE.2@5153,2094 ; 5119.81,2080.25 cw(c5153,2047.06) SPI:W_CSN-SCK-MISO-MOSI-W_IRQ-W_CE.2@5153,2094
SWD_CLK: SWD:VCC-IO-CLK-GND.3 U1.37 | length 1712.4
  Top Layer w10: U1.37@4894.43,2644.9 4894.43,2694.43 4900,2700 4993,2700 5170,2523 5447,2523 5628,2704 5628,3089 5691.86,3152.86 ; 5691.86,3152.86 cw(c5726,3118.72) SWD:VCC-IO-CLK-GND.3@5726,3167 ; 5691.86,3152.86 ccw(c5657.72,3187) SWD:VCC-IO-CLK-GND.3@5706,3187 ; 5691.86,3152.86 cw(c5726,3118.72) SWD:VCC-IO-CLK-GND.3@5726,3167 ; 5691.86,3152.86 ccw(c5657.72,3187) SWD:VCC-IO-CLK-GND.3@5706,3187 ; 5691.86,3152.86 cw(c5726,3118.72) SWD:VCC-IO-CLK-GND.3@5726,3167 ; 5691.86,3152.86 ccw(c5657.72,3187) SWD:VCC-IO-CLK-GND.3@5706,3187 ; 5691.86,3152.86 cw(c5726,3118.72) SWD:VCC-IO-CLK-GND.3@5726,3167 ; 5691.86,3152.86 ccw(c5657.72,3187) SWD:VCC-IO-CLK-GND.3@5706,3187
SWD_DIO: SWD:VCC-IO-CLK-GND.2 U1.34 | length 1462.1
  Top Layer w10: U1.34@4963.33,2536.63 5024.37,2536.63 5060,2501 5459,2501 5644,2686 5644,2985.56 5691.86,3033.41 5691.86,3052.86 ; 5691.86,3052.86 cw(c5726,3018.72) SWD:VCC-IO-CLK-GND.2@5726,3067 ; 5691.86,3052.86 ccw(c5657.72,3087) SWD:VCC-IO-CLK-GND.2@5706,3087 ; 5691.86,3052.86 cw(c5726,3018.72) SWD:VCC-IO-CLK-GND.2@5726,3067 ; 5691.86,3052.86 ccw(c5657.72,3087) SWD:VCC-IO-CLK-GND.2@5706,3087 ; 5691.86,3052.86 cw(c5726,3018.72) SWD:VCC-IO-CLK-GND.2@5726,3067 ; 5691.86,3052.86 ccw(c5657.72,3087) SWD:VCC-IO-CLK-GND.2@5706,3087 ; 5691.86,3052.86 cw(c5726,3018.72) SWD:VCC-IO-CLK-GND.2@5726,3067 ; 5691.86,3052.86 ccw(c5657.72,3087) SWD:VCC-IO-CLK-GND.2@5706,3087